# EAGLE board Atividade 3 (EAGLE 9.6.2)
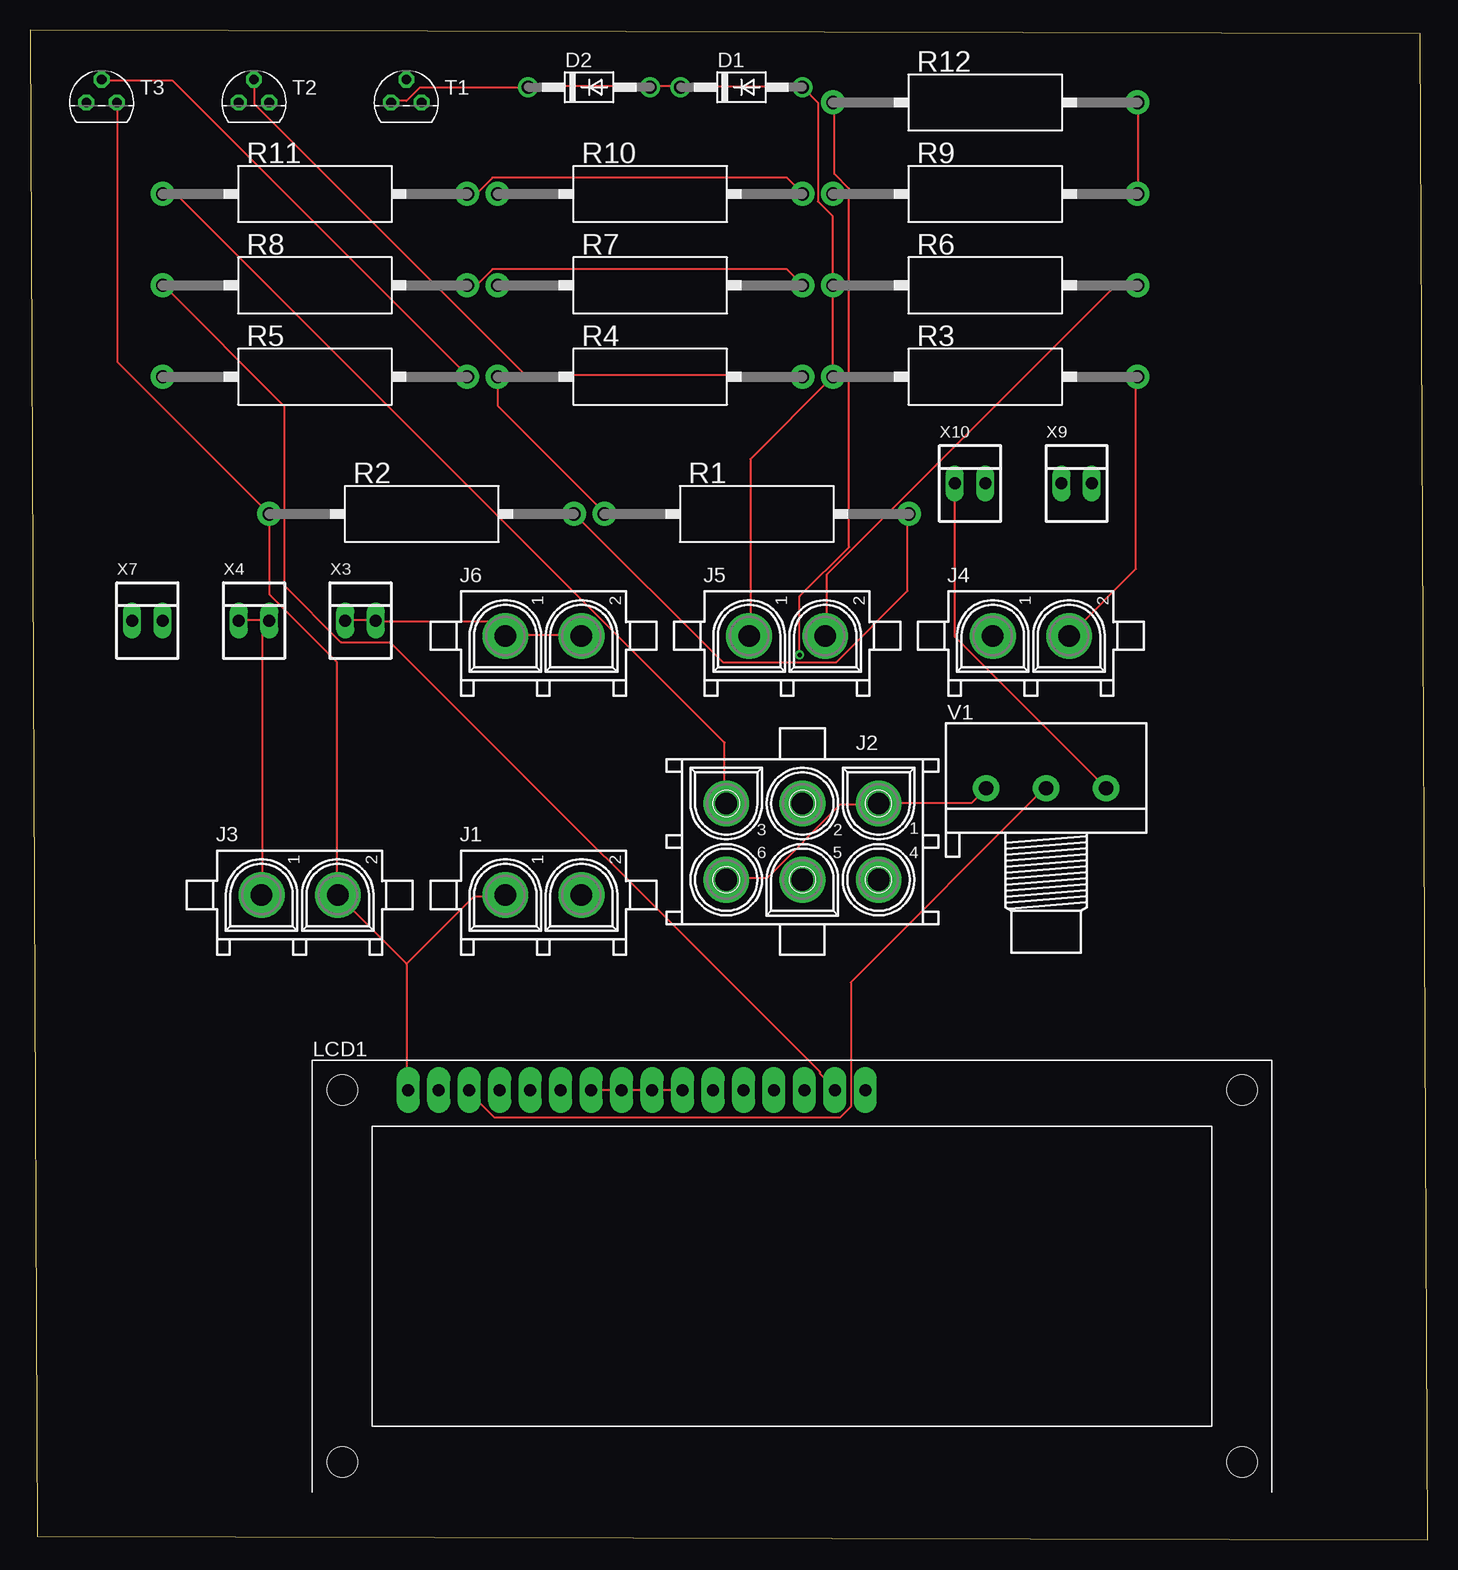
[diagram p0: board, top side]
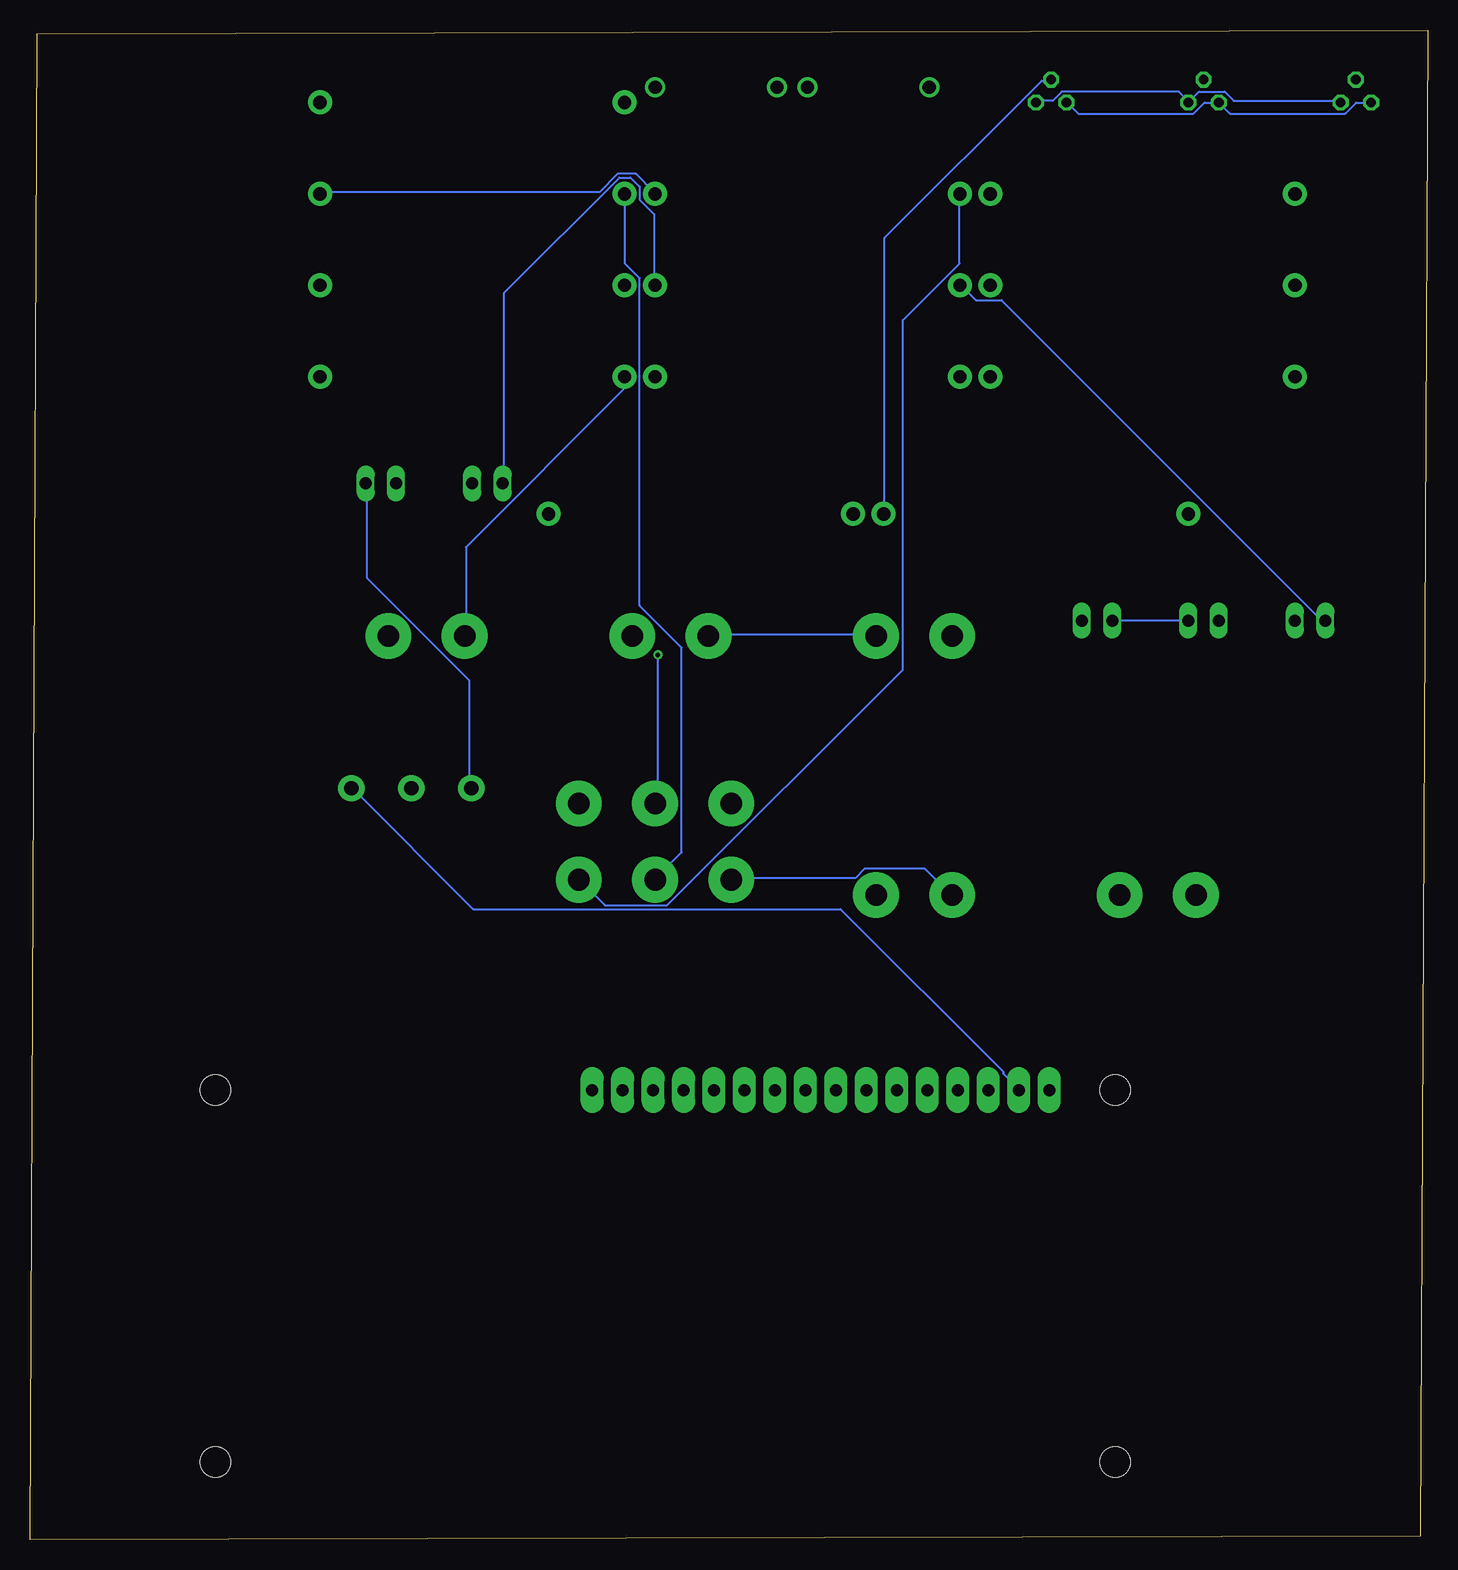
[diagram p1: board, bottom side, seen from below]

Size 116.5 x 125.8 mm. Coordinates in mm from the lower left corner, seen from the top.
Outline: 0.6,0.3 116.5,0 115.9,125.5 0,125.8 0.6,0.3
Copper layers (1*16): Top 0.035mm / dielectric 1.5mm / Bottom 0.035mm
Design rules "default": minimum track width 6mil, minimum drill 0.35mm, track to track 6mil, track to pad 6mil, pad to pad 6mil, via to via 6mil, smd to smd 6mil, copper to edge 40mil, drill to drill 6mil, minimum pad ring 10mil, minimum via ring 8mil, stop-mask expansion 4mil, vias tented up to drill 0mil, thermal gap 10mil

## Footprints (pad centres in the part's own frame; a part is rotated, then mirrored left to right if it is on the bottom)
DO41-10 = drill 1.118: A 5.08,0; C -5.08,0
350428-1 = drill 1.8 pad 3.81: 1 -3.175,0; 2 3.175,0
350431-1 = drill 1.8 pad 3.81: 1 6.35,0; 2 0,0; 3 -6.35,0; 4 6.35,-6.35; 5 0,-6.35; 6 -6.35,-6.35
HY-1602F = drill 1 pad 1.93 long: 1 2.54,0; 2 5.08,0; 3 7.62,0; 4 10.16,0; 5 12.7,0; 6 15.24,0; 7 17.78,0; 8 20.32,0; 9 22.86,0; 10 25.4,0; 11 27.94,0; 12 30.48,0; 13 33.02,0; 14 35.56,0; 15 38.1,0; 16 40.64,0 | hole 2.5: -2.96,0; 72.04,0; -2.96,-31; 72.04,-31
AC03 = drill 1.1 pad 2: 1 -12.7,0; 2 12.7,0
TO92 = drill 0.813 octagon: 1 1.27,0; 2 0,1.905; 3 -1.27,0
3RP/1610N = drill 1.2 pad 2.184: 1 -5,0; 2 0,0; 3 5,0
22-23-2021 = drill 1 long: 1 -1.27,0; 2 1.27,0

## Placement (x,y rotation side)
D1  1N4004  [DO41-10]  59.31,121.03 0 top
D2  1N4004  [DO41-10]  46.61,121.03 0 top
J1  350428-1  [350428-1]  42.8,53.72 0 top
J2  350431-1  [350431-1]  64.39,61.34 0 top
J3  350428-1  [350428-1]  22.48,53.72 0 top
J4  350428-1  [350428-1]  83.44,75.31 0 top
J5  350428-1  [350428-1]  63.12,75.31 0 top
J6  350428-1  [350428-1]  42.8,75.31 0 top
LCD1  LCD_2X16_SIL  [HY-1602F]  29,37.46 0 top
R1  470  [AC03]  60.58,85.47 0 top
R2  10k  [AC03]  32.64,85.47 0 top
R3  [AC03]  79.63,96.9 0 top
R4  470  [AC03]  51.69,96.9 0 top
R5  470  [AC03]  23.75,96.9 0 top
R6  [AC03]  79.63,104.52 0 top
R7  4.7k  [AC03]  51.69,104.52 0 top
R8  220  [AC03]  23.75,104.52 0 top
R9  10k  [AC03]  79.63,112.14 0 top
R10  10k  [AC03]  51.69,112.14 0 top
R11  10k  [AC03]  23.75,112.14 0 top
R12  10k  [AC03]  79.63,119.76 0 top
T1  BC337  [TO92]  31.37,119.76 0 top
T2  BC337  [TO92]  18.67,119.76 0 top
T3  BC337  [TO92]  5.97,119.76 0 top
V1  10k  [3RP/1610N]  84.71,62.61 0 top
X3  22-23-2021  [22-23-2021]  27.56,76.58 0 top
X4  22-23-2021  [22-23-2021]  18.67,76.58 0 top
X7  22-23-2021  [22-23-2021]  9.78,76.58 0 top
X9  22-23-2021  [22-23-2021]  87.25,88.01 0 top
X10  22-23-2021  [22-23-2021]  78.36,88.01 0 top

## Library data of the parts
D1 D2 = diode
J1-J6 = con-amp
LCD1 = lcd_2x16_led_backlight
R1-R12 = resistor-power; OC_FARNELL: unknown; OC_NEWARK: unknown
T1-T3 = transistor
V1 = pot
X3 X4 X7 X9 X10 = con-molex; MF: MOLEX; MPN: 22-23-2021; OC_FARNELL: 1462926; OC_NEWARK: 25C3832

## Nets
A0: J2.5 R9.1
A1: J2.4 R10.1
A2: J2.3 R11.1
A3: J2.2 R12.1
A4: LCD1.4
A5: LCD1.6
D1: LCD1.2 R7.2 R8.2 V1.3 X10.1
D2: LCD1.11
D3: LCD1.12
D4: LCD1.13
D5: LCD1.14
D7: R7.1 X7.1
D9: R1.1 R4.1
D10: R5.1
GND: J1.1 J2.1 J2.6 J3.2 LCD1.1 R2.1 T1.1 T2.1 T3.1 V1.1 X9.2
N$1: R1.2 R2.2 T1.2
N$2: J4.2 R3.2
N$4: R4.2 T2.2
N$5: R5.2 T3.2
N$6: J5.2 R6.2
N$7: LCD1.3 V1.2
N$9: LCD1.5
N$11: LCD1.7 LCD1.8 LCD1.9 LCD1.10
N$16: LCD1.15 R8.1
N$17: LCD1.16
N$20: R9.2 R10.2 R11.2 R12.2
RST: J1.2
VIN: D1.A D1.C D2.A D2.C J3.1 J4.1 J5.1 J6.1 J6.2 R3.1 R6.1 T1.3 T2.3 T3.3 X3.1 X3.2 X4.1 X4.2

## Tracks (layer width: path | path; a pad name or v marks a point on that pad's centre or on a via)
A0
  Bottom 0.152: R9.1 66.9,112.13 66.9,106.34 65.68,105.12 65.68,77.84 62.18,74.33 62.18,57.27 64.31,55.13 J2.5
A1
  Bottom 0.152: R10.1 39.01,112.13 39.01,106.34 43.74,101.61 43.74,72.51 63.4,52.85 68.58,52.85 70.71,54.98 J2.4
A2
  Top 0.152: R11.1 11.12,112.13 12.19,112.13 57.91,66.41 57.91,61.38 J2.3
A3  (via drill 0.35)
  Top 0.152: v64.16,73.72 64.16,78.6 68.28,82.72 68.28,112.59 67.06,113.81 67.06,119.75 R12.1
  Bottom 0.152: v64.16,73.72 64.16,61.53 64.31,61.38 J2.2
D1
  Top 0.152: R8.2 36.58,104.66 37.34,104.66 38.56,105.88 63.09,105.88 64.31,104.66 R7.2 | X10.1 77.11,87.9 77.11,75.25 89.61,62.75 V1.3
  Bottom 0.152: LCD1.2 34.14,37.61 35.36,38.83 35.36,38.98 48.92,52.54 79.55,52.54 89.61,62.6 V1.3 | R7.2 64.47,104.66 64.47,110.45 65.68,111.67 65.68,112.74 66.45,113.5 67.36,113.5 76.96,103.9 76.96,88.05 X10.1
D7
  Bottom 0.152: X7.1 8.53,76.62 8.84,76.62 35.51,103.29 37.64,103.29 38.86,104.51 R7.1
D9
  Top 0.152: R4.1 39.01,96.89 39.01,94.45 47.85,85.61 R1.1
GND
  Top 0.152: J2.6 58.06,55.13 61.42,55.13 67.51,61.23 70.71,61.23 J2.1 70.87,61.38 78.49,61.38 V1.1 | 31.39,47.97 31.39,37.61 LCD1.1 | 31.39,47.97 25.76,53.61 J3.2 25.6,53.76 25.6,73.11 19.96,78.75 19.96,85.46 R2.1 19.81,85.61 7.32,98.11 7.32,119.75 T3.1 | 31.39,47.97 37.03,53.61 39.62,53.61 J1.1
  Bottom 0.152: X9.2 88.39,87.9 88.39,80.13 79.86,71.59 79.86,62.75 V1.1 | T3.1 7.32,119.9 16.15,119.9 16.92,120.66 19.05,120.66 19.81,119.9 T2.1 19.96,119.9 20.73,120.66 30.48,120.66 31.24,119.9 32.61,119.9 T1.1 | J2.6 57.91,55.13 47.7,55.13 46.94,55.89 41.91,55.89 39.78,53.76 J1.1
N$1
  Top 0.152: R1.2 73.15,85.46 73.15,79.06 67.21,73.11 57.76,73.11 45.41,85.46 R2.2
  Bottom 0.152: T1.2 31.39,121.58 32.16,121.58 45.26,108.47 45.26,85.61 R2.2
N$2
  Top 0.152: R3.2 92.2,96.89 92.2,80.89 86.72,75.4 J4.2
N$4
  Top 0.152: T2.2 18.75,121.58 18.75,119.6 41.3,97.04 64.31,97.04 R4.2
N$5
  Top 0.152: T3.2 6.1,121.58 11.89,121.58 36.42,97.04 R5.2
N$6
  Top 0.152: R6.2 92.2,104.51 90.53,104.51 66.45,80.43 66.45,75.4 J5.2
N$7
  Top 0.152: LCD1.3 36.73,37.45 36.73,37.15 38.71,35.17 67.51,35.17 68.43,36.08 68.43,46.45 84.58,62.6 V1.2
N$11
  Top 0.152: LCD1.7 49.23,37.45 LCD1.8 49.38,37.45 51.82,37.45 LCD1.9 51.97,37.45 54.25,37.45 LCD1.10
N$16
  Top 0.152: LCD1.15 67.06,37.61 65.84,38.83 65.84,38.98 30.02,74.79 25.91,74.79 21.18,79.52 21.18,94.45 11.12,104.51 R8.1
N$20
  Top 0.152: R9.2 92.35,112.28 92.35,119.75 R12.2 | R11.2 36.58,112.28 37.34,112.28 38.56,113.5 63.09,113.5 64.31,112.28 R10.2
  Bottom 0.152: R9.2 92.2,112.28 69.04,112.28 67.51,113.81 65.99,113.81 64.47,112.28 R10.2
VIN
  Top 0.152: 19.36,76.62 19.81,76.62 X4.2 19.36,76.62 | 19.36,76.62 17.53,76.62 X4.1 | X3.1 26.36,76.62 28.8,76.62 X3.2 28.96,76.47 38.56,76.47 39.62,75.4 J6.1 39.78,75.4 45.87,75.4 J6.2 | 19.36,76.62 19.36,53.76 J3.1 | T1.3 30.18,119.9 31.39,119.9 32.46,120.97 41.45,120.97 D2.C 41.6,121.12 51.66,121.12 D2.A 51.82,121.12 54.1,121.12 D1.C 54.25,121.12 64.31,121.12 D1.A 64.47,120.97 65.68,119.75 65.68,111.52 66.9,110.3 66.9,104.66 R6.1 66.9,104.51 66.9,97.04 R3.1 66.9,96.89 60.05,90.03 60.05,75.4 J5.1
  Bottom 0.152: X4.2 19.96,76.62 26.21,76.62 X3.1 | J5.1 59.89,75.4 46.02,75.4 J6.2 | T3.3 4.72,119.75 5.94,119.75 6.86,118.84 16.46,118.84 17.37,119.75 T2.3 17.53,119.75 18.59,119.75 19.51,118.84 29.11,118.84 30.02,119.75 T1.3 | J4.1 80.16,75.4 80.16,82.72 67.06,95.82 67.06,96.89 R3.1